# Altium PCB BOC1_06.PcbDoc (part 1 of 4)
Units mil, origin at the board's own origin, x right, y up, seen from the top; angles counter-clockwise.
Board outline 7900 x 6500 mil, 2 copper layers (Top Layer, Bottom Layer); 312 components, 413 nets, 1710 pads, 368 vias.
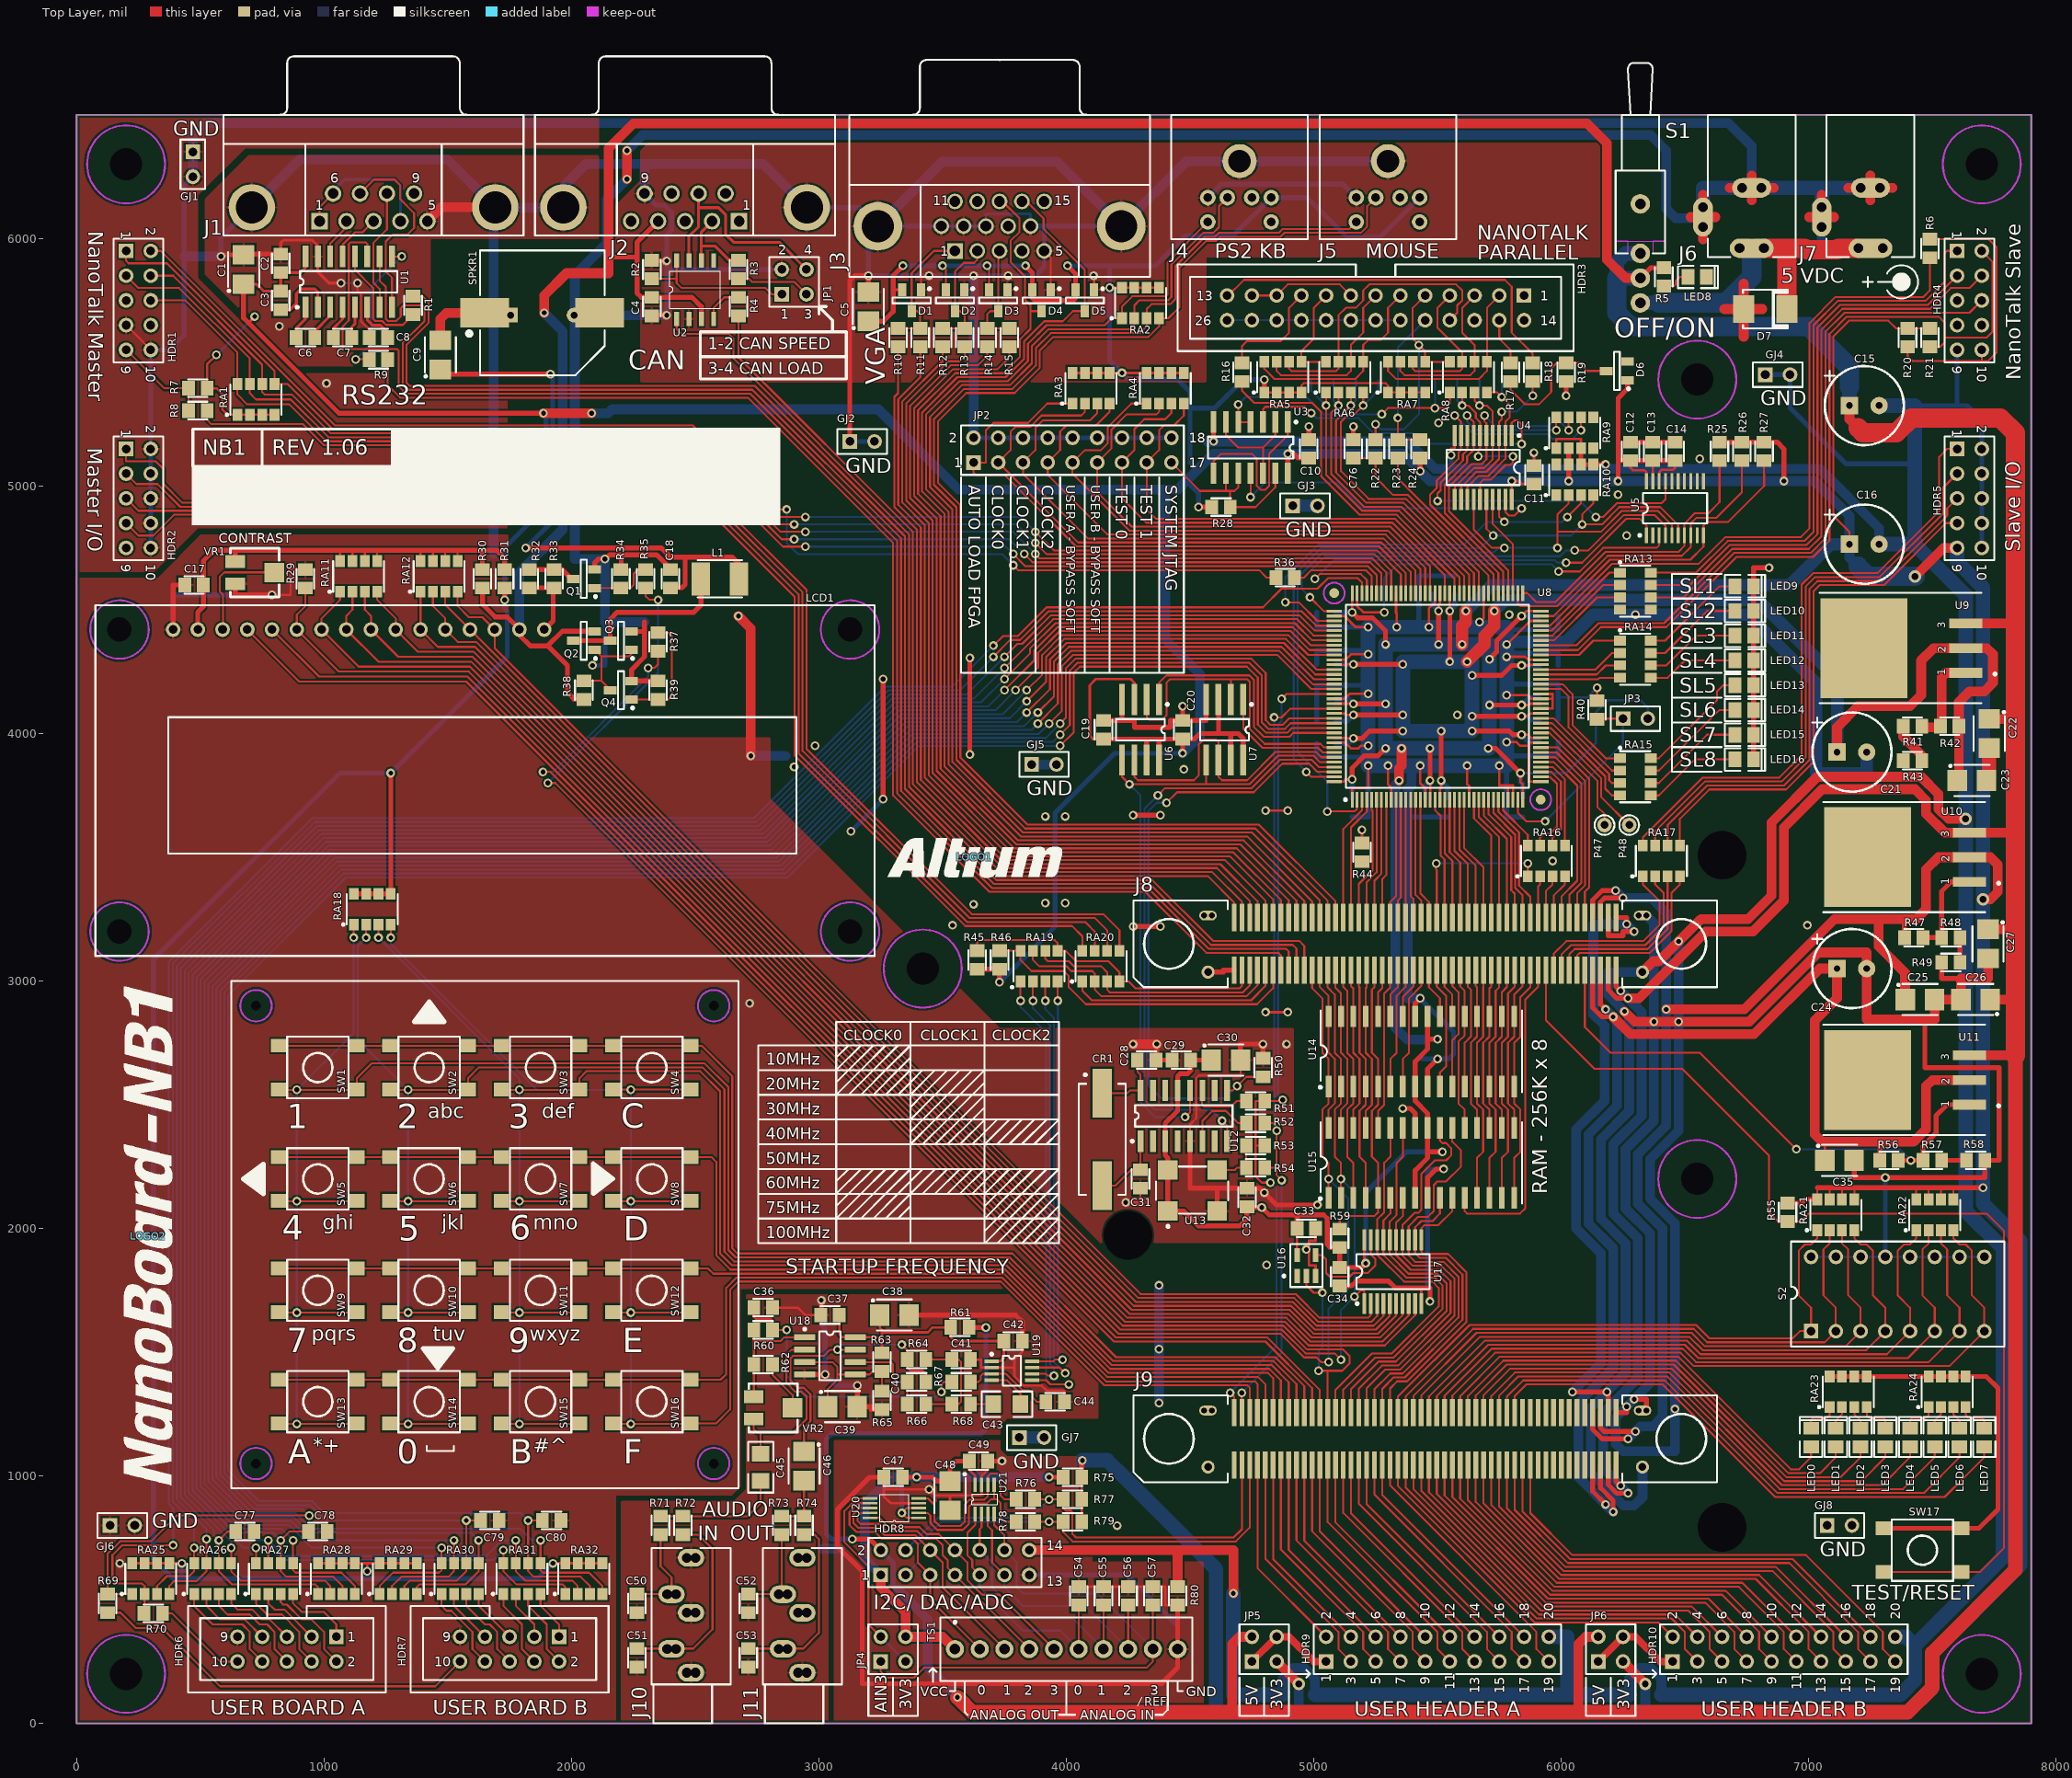
[diagram p0: Top Layer view]
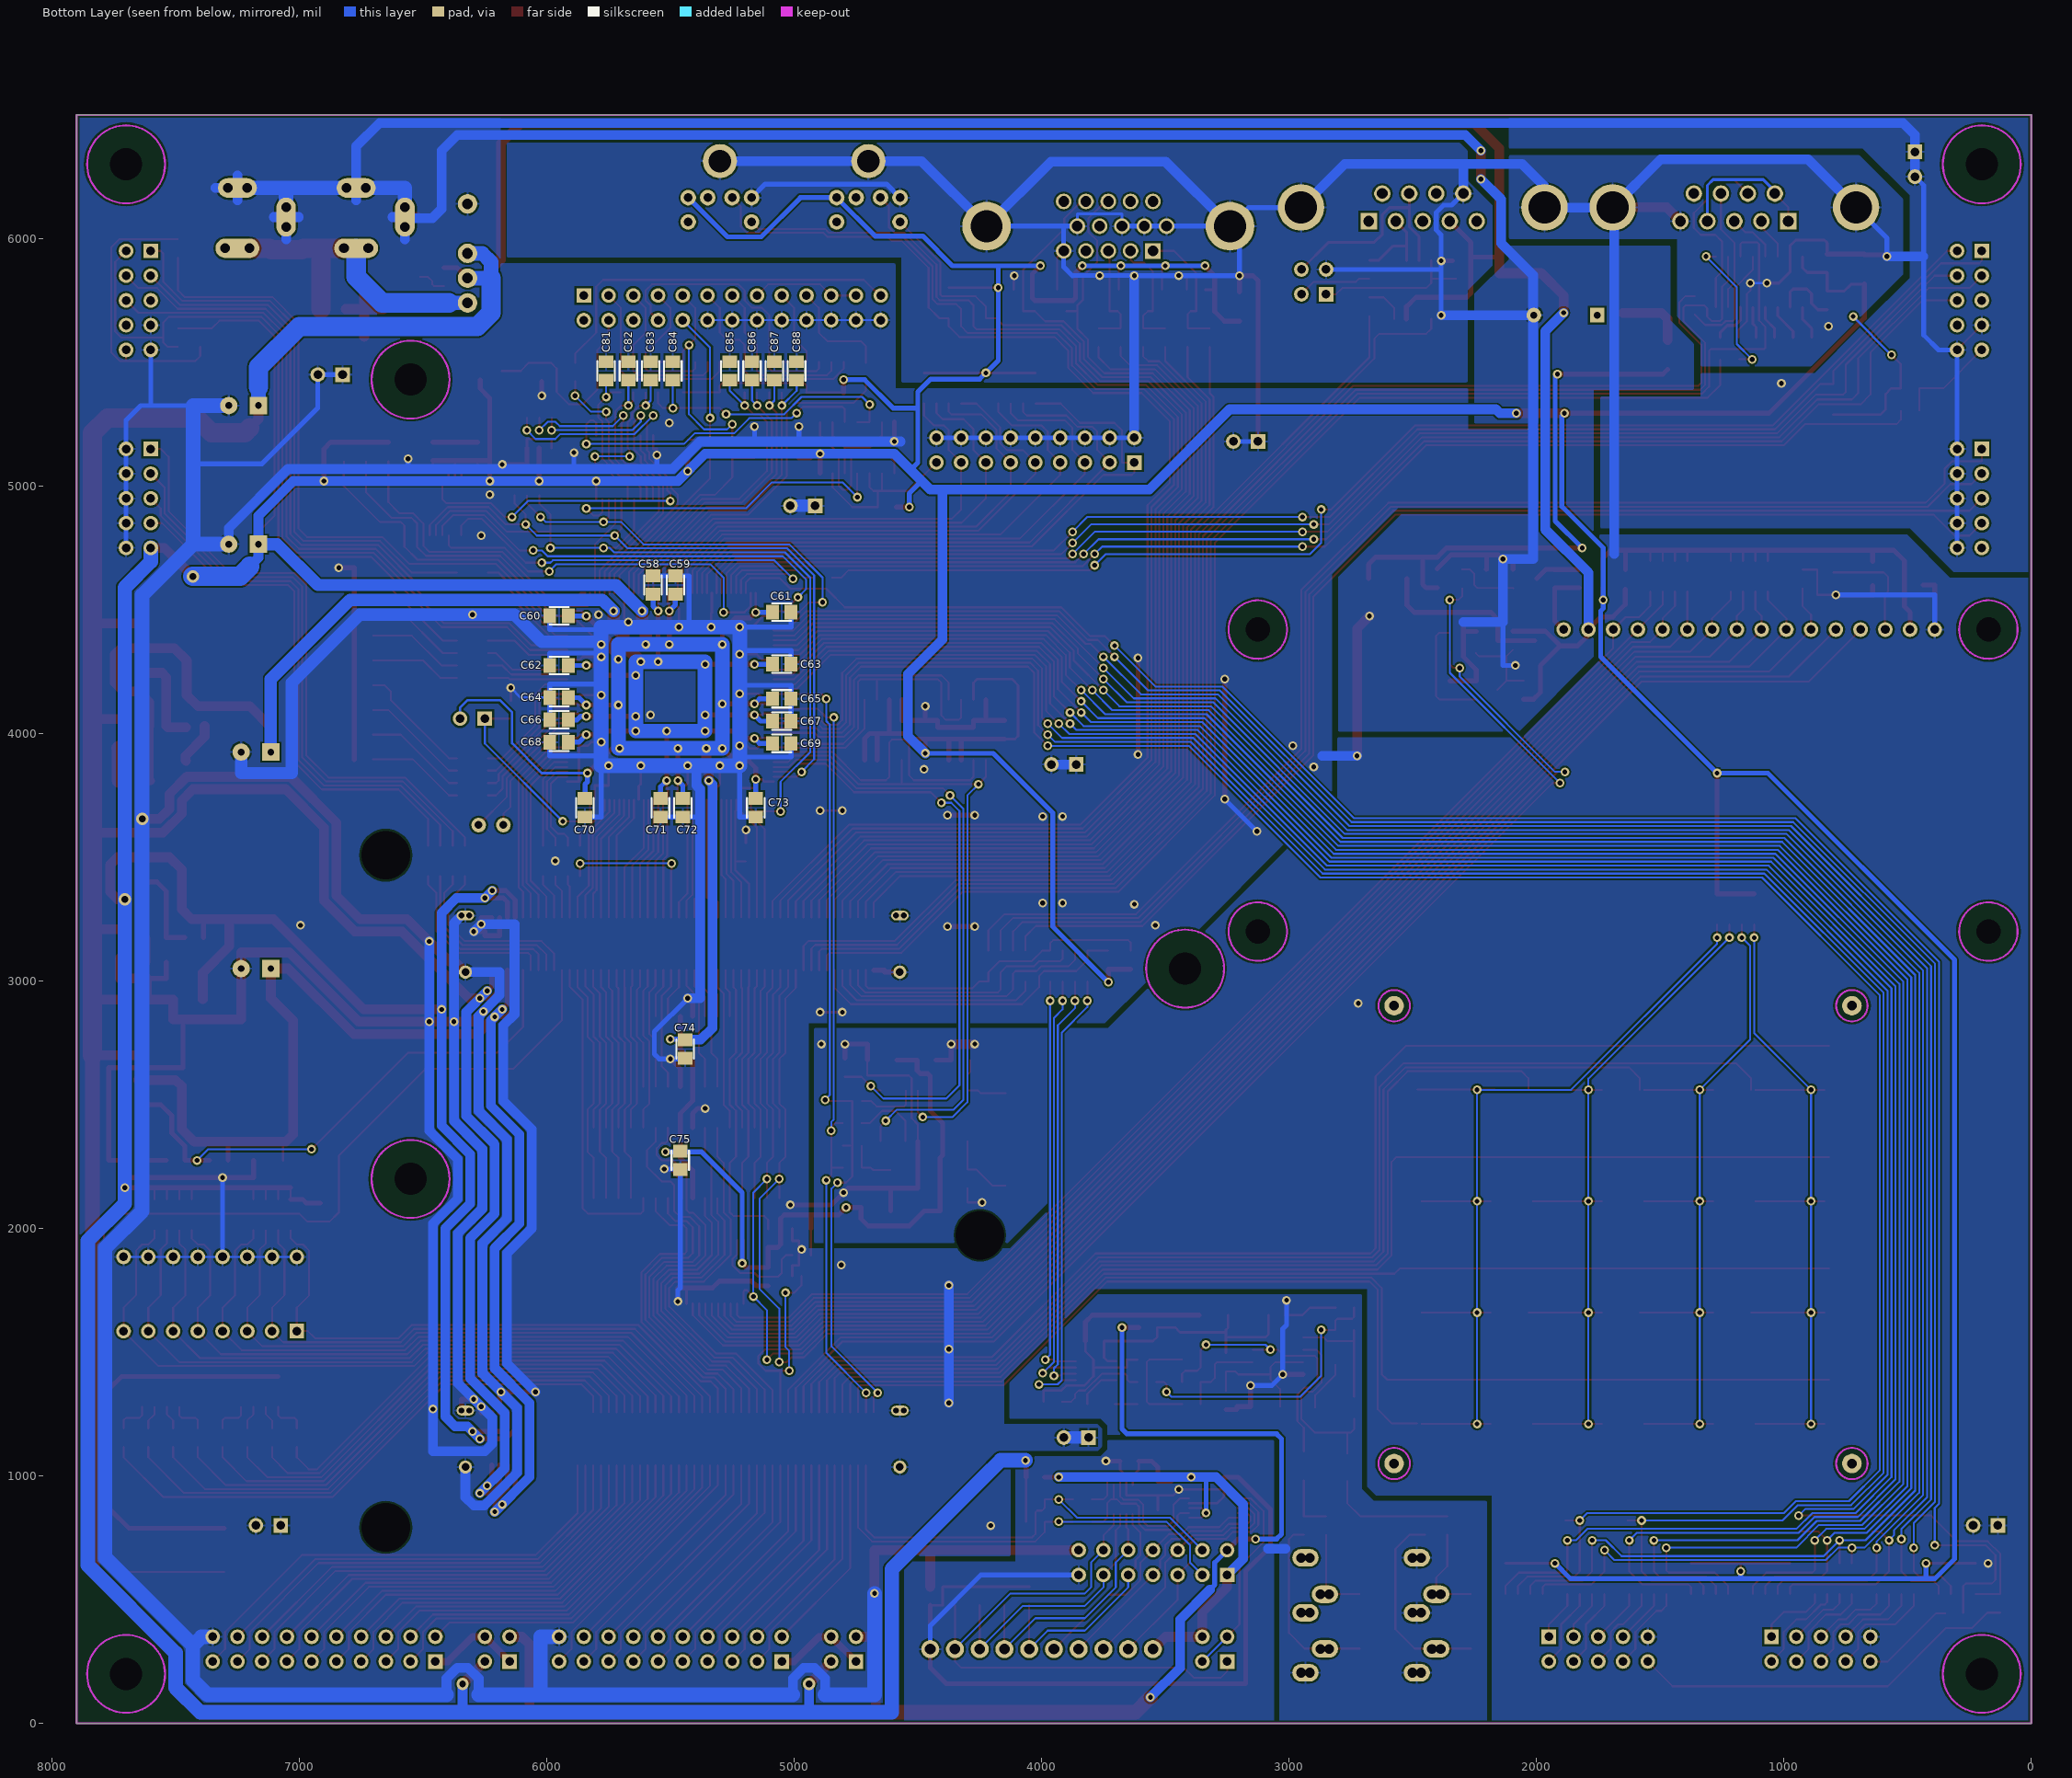
[diagram p1: Bottom Layer view, seen from below]

## Layer stack, top to bottom
Top Solder: solder mask 0.4, Solder Resist, Dk 3.5
Top Layer: signal copper 1.4
Dielectric1: core 12.6, FR-4, Dk 4.8
Bottom Layer: signal copper 1.4
Bottom Solder: solder mask 0.4, Solder Resist, Dk 3.5

## Board outline
0,0 7900,0 7900,6500 0,6500

## Design rules (kind name [scope] priority, off if disabled: settings)
Clearance [All] p1: gap=7.87 ignorepadtopadclearanceinfootprint=FALSE except(0: Arc-Hole Track-Hole SMDPad-Hole THPad-Hole Via-Hole Fill-Hole Poly-Hole Region-Hole Text-Hole)
ComponentClearance LEDComponentClearance [HasFootprint('SMD _LED') vs HasFootprint('SMD _LED')] p1: gap=1.18 collisioncheckmode=3 verticalgap=10 showdistances=FALSE
ComponentClearance ComponentClearance_General [Not InComponent('LCD1') vs Not InComponentClass('Under_LCD1')] p2: gap=7.87 collisioncheckmode=3 verticalgap=10 showdistances=FALSE
ComponentClearance ComponentClearance_Default [All] p3 off: gap=7.87 collisioncheckmode=3 verticalgap=10 showdistances=FALSE
FabricationTestPointUsage TestPointUsage [All] p1 off: valid=0 allowmultiple=FALSE
FabricationTestpoint Testpoint [All] p1 off: side=3 testpointundercomponent=TRUE minsize=40 maxsize=100 preferedsize=60 minholesize=0 maxholesize=40 preferedholesize=32 testpointgrid=1 allowsidetop=TRUE allowsidebottom=TRUE usegrid=TRUE gridtolerance=0.01
FanoutControl Fanout_Default [All] p1: bgadir=Out bgaviamode=Centered fanoutstyle=Auto fanoutdirection=Alternating viagrid=1 // Fanout_Default (Default Rule)
FanoutControl Fanout_Small [(CompPinCount < 5)] p2: bgadir=Out bgaviamode=Centered fanoutstyle=Auto fanoutdirection=OutThenIn viagrid=1 // Fanout_Small (Default Rule)
FanoutControl Fanout_LCC [IsLCC] p4: bgadir=Out bgaviamode=Centered fanoutstyle=Auto fanoutdirection=Alternating viagrid=1 // Fanout_LCC (Default Rule)
FanoutControl Fanout_BGA [IsBGA] p5: bgadir=Out bgaviamode=Centered fanoutstyle=Auto fanoutdirection=Alternating viagrid=1 // Fanout_BGA (Default Rule)
Height MaxMinHeight [All] p1: minheight=0 maxheight=1000 prefheight=500
HoleSize HoleSize_1 [inpadclass('Connector_Slot_Pads')] p1: absolutevalues=TRUE maxlimit=1 minlimit=0 maxpercent=80.000 minpercent=20.000
HoleSize [All] p2: absolutevalues=TRUE maxlimit=200.79 minlimit=1 maxpercent=80.000 minpercent=20.000
PlaneClearance [All] p1: clearance=19.68
PlaneConnect [All] p1: planeconnectstyle=Relief reliefexpansion=19.68 reliefentries=4 reliefconductorwidth=9.84 reliefairgap=9.84
PolygonConnect [All] p1: connectstyle=Relief reliefconductorwidth=9.84 reliefentries=4 polygonreliefangle="90 Angle" airgapwidth=10
RoomDefinition BOC_Audio [InComponentClass('BOC_Audio')] p1 off: confinementstyle=ConfineIn formatcopy=TRUE lockcomponents=FALSE outline 6400,6600 6600,6600 6600,6700 6400,6700
RoomDefinition BOC_Spartan [InComponentClass('BOC_Spartan')] p2 off: confinementstyle=ConfineIn formatcopy=TRUE lockcomponents=FALSE outline 5600,6600 5800,6600 5800,6700 5600,6700
RoomDefinition BOC_Boot [InComponentClass('BOC_Boot')] p3 off: confinementstyle=ConfineIn formatcopy=TRUE lockcomponents=FALSE outline 6000,6600 6200,6600 6200,6700 6000,6700
RoomDefinition BOC_KB [InComponentClass('BOC_KB')] p4 off: confinementstyle=ConfineIn formatcopy=TRUE lockcomponents=FALSE outline 598.76,864.17 598.76,2486.22 890.13,2486.22 890.13,3087.5 1134.81,3087.5 1134.81,2684.87 6027.34,2684.87 6027.34,1365.83 6541.24,1365.83 6541.24,1093.78 2350.85,1093.78 2350.85,864.17
RoomDefinition BOC_LED_DIPSWITCH [InComponentClass('BOC_LED_DIPSWITCH')] p5 off: confinementstyle=ConfineIn formatcopy=TRUE lockcomponents=FALSE outline 6933,1621 7803,1621 7803,2703 6933,2703
RoomDefinition BOC_PWR [InComponentClass('BOC_PWR')] p6 off: confinementstyle=ConfineIn formatcopy=TRUE lockcomponents=FALSE outline 358.19,5688.19 358.19,5911.81 5462.54,5911.81 5462.54,6011.81 6438.98,6011.81 6438.98,4284.65 6785.83,4284.65 6785.83,3810.3 6800.79,3810.3 6800.79,3589.7 6785.83,3589.7 6785.83,2916.14 6749.86,2916.14 6749.86,2777.86 6235.3,2777.86 6235.3,2750.2 6108.02,2750.2 6108.02,1369.09 5884.4,1369.09 5884.4,1393.7 3465.33,1393.7 3465.33,3137.93 3464.07,3137.93 3464.07,4568.19 3078.19,4568.19 3078.19,5688.19
RoomDefinition BOC_CLK_ADJ [InComponentClass('BOC_CLK_ADJ')] p7 off: confinementstyle=ConfineIn formatcopy=TRUE lockcomponents=FALSE outline 3202,2149 4333,2149 4333,3288 3202,3288
RoomDefinition BOC_IO [InComponentClass('BOC_IO')] p8 off: confinementstyle=ConfineIn formatcopy=TRUE lockcomponents=FALSE outline 3738.19,638.19 3738.19,861.81 5361.81,861.81 6559.18,861.81 6559.18,638.19 3738.19,638.19
RoomDefinition BOC_ADC_DAC [InComponentClass('BOC_ADC_DAC')] p9 off: confinementstyle=ConfineIn formatcopy=TRUE lockcomponents=FALSE outline 2611.75,974.41 2611.75,1104.33 2675.14,1104.33 2675.14,1197.14 2827.86,1197.14 2827.86,1324.87 3022.34,1324.87 3022.34,1272.34 3199.86,1272.34 3199.86,1124.87 3827.44,1124.87 3827.44,975.14 3722.15,975.14 3722.15,975.13 3720.87,975.13 3720.87,681.3 2633.86,681.3 2633.86,974.41
RoomDefinition BOC_LCD [InComponentClass('BOC_LCD')] p10 off: confinementstyle=ConfineIn formatcopy=TRUE lockcomponents=FALSE outline 47.38,2772.38 47.38,4244.94 400.14,4244.94 400.14,4347.15 588.76,4347.15 588.76,4461.57 1294.21,4461.57 1294.21,5140.3 1439.7,5140.3 1439.7,5463.78 2124.87,5463.78 2124.87,4567.15 4534.87,4567.15 4534.87,2278.52 4805.42,2278.52 4805.42,1912.25 4706.61,1912.25 4706.61,1609.23 4529.45,1609.23 4529.45,1912.25 4483.57,1912.25 4483.57,2000.14 4352.85,2000.14 4352.85,2772.38
RoomDefinition BOC_SRAM [InComponentClass('BOC_SRAM')] p11 off: confinementstyle=ConfineIn formatcopy=TRUE lockcomponents=FALSE outline 4292.66,2155.13 4292.66,2304.86 4344.79,2304.86 4344.79,3184.03 5188.78,3184.03 5188.78,2340.2 4387.15,2340.2 4387.15,2155.13
RoomDefinition BOC_DAUGHTER [InComponentClass('BOC_DAUGHTER')] p12 off: confinementstyle=ConfineIn formatcopy=TRUE lockcomponents=FALSE outline 4059.06,1271.59 4059.06,3586.68 5525.59,3586.68 5525.59,1271.59
RoomDefinition BOC_RS232 [InComponentClass('BOC_RS232')] p13 off: confinementstyle=ConfineIn formatcopy=TRUE lockcomponents=FALSE outline 481.89,5923.03 481.89,6748.03 1718.11,6748.03 1718.11,5923.03 1307.15,5923.03 1307.15,5655.13 1199.87,5655.13 1199.87,5552.85 1194.87,5552.85 1194.87,5462.66 1045.13,5462.66 1045.13,5552.86 750.13,5552.86 750.13,5675.13 677.86,5675.13 677.86,5764.7 499.21,5764.7 499.21,5923.03
RoomDefinition BOC_CAN [InComponentClass('BOC_CAN')] p14 off: confinementstyle=ConfineIn formatcopy=TRUE lockcomponents=FALSE outline 1743.31,5921.22 1743.31,6741.14 2979.53,6741.14 2979.53,5921.22 2911.81,5921.22 2911.81,5659.13 2622.34,5659.13 2622.34,5650.14 2512.01,5650.14 2512.01,5633.6 2287.6,5633.6 2287.6,5650.14 2177.86,5650.14 2177.86,5800.13 2177.66,5800.13 2177.66,5921.22
RoomDefinition BOC_VGA_KB_MOUSE [InComponentClass('BOC_VGA_KB_MOUSE')] p15 off: confinementstyle=ConfineIn formatcopy=TRUE lockcomponents=FALSE outline 2639,5519 5463,5519 5463,6734 2639,6734
RoutingVias [All] p1: holewidth=19.68 width=35.43 viastyle="Through Hole" minholewidth=19.68 minwidth=35.43 maxholewidth=28 maxwidth=50
SilkToSolderMaskClearance SilkscreenOverComponentPads [IsPad] p1: minsilkscreentomaskgap=10 clearancetoexposedcopper=TRUE
SolderMaskExpansion SolderMaskExpansion_Vias [IsVia] p1: expansion=-25.59 istentingtop=FALSE
SolderMaskExpansion [All] p2: expansion=3.94 istentingtop=FALSE
Width Pwr_Width [InNetClass('Power Nets')] p1: maxlimit=118.11 minlimit=7.87 preferedwidth=19.68 toplayer_prefwidth=9.84 minimp=50.000000 maximp=50.000000 favimp=50.000000
Width [All] p2: maxlimit=59.05 minlimit=7.87 preferedwidth=7.87
18 further rules are at their usual default settings.

## Classes and differential pairs
component class Under_LCD1: Q2 Q3 Q4 R37 R38 R39 RA18
net class RAM1_DATA[0..7]: RAM1_DATA0 RAM1_DATA1 RAM1_DATA2 RAM1_DATA3 RAM1_DATA4 RAM1_DATA5 RAM1_DATA6 RAM1_DATA7
net class "Power Nets": 1V8 5V AGND GND PWR_IN VCC VCC_LCD VCCA VCCINT
net class SWR[0..3]: SWR0 SWR1 SWR2 SWR3
net class SWC[0..3]: SWC0 SWC1 SWC2 SWC3
net class SW[0..7]: SW0 SW1 SW2 SW3 SW4 SW5 SW6 SW7
net class RAM_ADDR[0..16]: RAM_ADDR0 RAM_ADDR1 RAM_ADDR2 RAM_ADDR3 RAM_ADDR4 RAM_ADDR5 RAM_ADDR6 RAM_ADDR7 RAM_ADDR8 RAM_ADDR9 RAM_ADDR10 RAM_ADDR11 RAM_ADDR12 RAM_ADDR13 RAM_ADDR14 RAM_ADDR15 RAM_ADDR16
net class RAM_ADDR[0..1]: RAM_ADDR0 RAM_ADDR1
net class RAM0_DATA[0..7]: RAM0_DATA0 RAM0_DATA1 RAM0_DATA2 RAM0_DATA3 RAM0_DATA4 RAM0_DATA5 RAM0_DATA6 RAM0_DATA7
net class MODE_[1..8]: MODE_1 MODE_2 MODE_3 MODE_4 MODE_5 MODE_6 MODE_7 MODE_8
net class JIOB[0..3]: JIOB0 JIOB1 JIOB2 JIOB3
net class JIOA[0..3]: JIOA0 JIOA1 JIOA2 JIOA3
net class IO[0..35]: IO0 IO1 IO2 IO3 IO4 IO5 IO6 IO7 IO8 IO9 IO10 IO11 IO12 IO13 IO14 IO15 IO16 IO17 IO18 IO19 IO20 IO21 IO22 IO23 IO24 IO25 IO26 IO27 IO28 IO29 IO30 IO31 IO32 IO33 IO34 IO35
pad class Connector_Slot_Pads: J6-1 J6-2 J6-3 J7-1 J7-2 J7-3 J8-MH2 J8-MH4 J9-MH2 J9-MH4 J10-1 J10-2 J10-3 J10-4 J10-5 J11-1 J11-2 J11-3 J11-4 J11-5
component class BOC_ADC_DAC: C47 C48 C49 C54 C55 C56 C57 HDR8 JP4 R75 R76 R77 R78 R79 R80 TS1 U20 U21
component class BOC_Audio: C36 C37 C38 C39 C40 C41 C42 C43 C44 C45 C46 C50 C51 C52 C53 J10 J11 R45 R46 R60 R61 R62 R63 R64 R65 R66 R67 R68 R71 R72 R73 R74 RA19 U18 U19 VR2
component class BOC_CAN: C4 J2 JP1 R2 R3 R4 U2
component class BOC_CLK_ADJ: C28 C29 C30 C31 C32 CR1 R50 R51 R52 R53 R54 U12 U13
component class BOC_DAUGHTER: J8 J9
component class BOC_IO: HDR9 HDR10 JP5 JP6
component class BOC_KB: R55 RA18 SW1 SW2 SW3 SW4 SW5 SW6 SW7 SW8 SW9 SW10 SW11 SW12 SW13 SW14 SW15 SW16 SW17
component class BOC_LCD: C9 C17 C18 C33 C34 L1 LCD1 Q1 Q2 Q3 Q4 R29 R30 R31 R32 R33 R34 R35 R37 R38 R39 RA11 RA12 SPKR1 U16 U17 VR1
component class BOC_LED_DIPSWITCH: LED0 LED1 LED2 LED3 LED4 LED5 LED6 LED7 RA21 RA22 RA23 RA24 S2
component class BOC_PWR: C15 C16 C21 C22 C23 C24 C25 C26 C27 C35 D7 GJ1 GJ2 GJ3 GJ4 GJ5 GJ6 GJ7 GJ8 J6 J7 R41 R42 R43 R47 R48 R49 R56 R57 R58 S1 U9 U10 U11
component class BOC_RS232: C1 C2 C3 C6 C7 C8 J1 R1 R9 U1
component class BOC_SRAM: C74 C75 R59 U14 U15
component class BOC_VGA_KB_MOUSE: C5 D1 D2 D3 D4 D5 J3 J4 J5 R10 R11 R12 R13 R14 R15 RA2
component class BOC_Boot: C10 C11 C12 C13 C14 C58 C59 C60 C61 C62 C63 C64 C65 C66 C67 C68 C69 C70 C71 C72 C73 C76 C81 C82 C83 C84 C85 C86 C87 C88 D6 HDR3 JP2 JP3 R16 R17 R18 R19 R22 R23 R24 R25 R26 R27 R28 R40 RA3 RA4 RA5 RA6 RA7 RA8 RA9 RA10 U3 U4 U5
component class BOC_Spartan: C19 C20 C77 C78 C79 C80 HDR1 HDR2 HDR4 HDR5 HDR6 HDR7 LED8 LED9 LED10 LED11 LED12 LED13 LED14 LED15 LED16 R5 R6 R7 R8 R20 R21 R36 R44 R69 R70 RA1 RA13 RA14 RA15 RA16 RA17 RA20 RA25 RA26 RA27 RA28 RA29 RA30 RA31 RA32 U6 U7 U8

## Components (designator, comment, footprint, x,y, rotation, side; value= is the part's Value field where it differs from the comment)
C1 "10uF" MCCT-B 675,5875 r90 top
C2 "100nF" CC2012-0805 825,5900 r90 top
C3 "100nF" CC2012-0805 825,5750 r270 top
C4 "100nF" CC2012-0805 2325,5725 r270 top
C5 "10uF" MCCT-B 3200,5725 r90 top
C6 "100nF" CC2012-0805 925,5600 r0 top
C7 "100nF" CC2012-0805 1075,5600 r0 top
C8 "100nF" CC2012-0805 1220,5600 r180 top
C9 "10uF" MCCT-B 1470,5530 r90 top
C10 "100nF" CC2012-0805 4980,5150 r90 top
C11 "100nF" CC2012-0805 5890,5045 r90 top
C12 "100nF" CC2012-0805 6280,5140 r270 top
C13 "100nF" CC2012-0805 6370,5140 r270 top
C14 "100nF" CC2012-0805 6460,5140 r270 top
C15 "470uF 16V" RB8/3.5 7225,5325 r90 top
C16 "470uF 16V" RB8/3.5 7225,4765 r90 top
C17 "100nF" CC2012-0805 475,4600 r180 top
C18 "22nF" CC2012-0805 2400,4625 r90 top
C19 "100nF" CC2012-0805 4150,4015 r270 top
C20 "100nF" CC2012-0805 4470,4015 r90 top
C21 "470uF 16V" RB8/3.5 7175,3925 r90 top
C22 "10uF" MCCT-B 7730,4000 r270 top
C23 "10uF" MCCT-B 7660,3810 r0 top
C24 "470uF 16V" RB8/3.5 7175,3050 r90 top
C25 "10uF" MCCT-B 7450,2925 r0 top
C26 "10uF" MCCT-B 7675,2925 r180 top
C27 "10uF" MCCT-B 7725,3150 r270 top
C28 "Do Not Install" CC2012-0805 4325,2680 r0 top
C29 "100nF" CC2012-0805 4465,2680 r180 top
C30 "10uF" MCCT-B 4645,2680 r0 top
C31 "Do Not Install" CC2012-0805 4300,2200 r270 top
C32 "100nF" CC2012-0805 4730,2125 r90 top
C33 "100nF" CC2012-0805 4970,2000 r0 top
C34 "100nF" CC2012-0805 5105,1805 r270 top
C35 "10uF" MCCT-B 7125,2275 r0 top
C36 "22nF" CC2012-0805 2775,1680 r0 top
C37 "100nF" CC2012-0805 3045,1650 r0 top
C38 "10uF" MCCT-B 3305,1650 r0 top
C39 "10uF" MCCT-B 3095,1280 r0 top
C40 "470pF" CC2012-0805 3395,1380 r0 top
C41 "4700pF" CC2012-0805 3575,1470 r0 top
C42 "100nF" CC2012-0805 3785,1545 r0 top
C43 "1uF" C3216-1206 3760,1290 r0 top
C44 "4700pF" CC2012-0805 3955,1300 r0 top
C45 "1uF" C3216-1206 2765,1035 r90 top
C46 "10uF" MCCT-B 2940,1040 r270 top
C47 "100nF" CC2012-0805 3300,995 r180 top
C48 "10uF" MCCT-B 3530,920 r270 top
C49 "100nF" CC2012-0805 3645,1060 r0 top
C50 "220pF" CC2012-0805 2265,485 r270 top
C51 "220pF" CC2012-0805 2265,265 r270 top
C52 "220pF" CC2012-0805 2715,485 r270 top
C53 "220pF" CC2012-0805 2715,265 r270 top
C54 "100pF" CC2012-0805 4050,515 r90 top
C55 "100pF" CC2012-0805 4150,515 r90 top
C56 "100pF" CC2012-0805 4250,515 r90 top
C57 "100pF" CC2012-0805 4350,515 r90 top
C58 "100nF" CC2012-0805 5570,4600 r90 bottom
C59 "100nF" CC2012-0805 5480,4600 r90 bottom
C60 "100nF" CC2012-0805 5950,4475 r0 bottom
C61 "100nF" CC2012-0805 5050,4490 r180 bottom
C62 "100nF" CC2012-0805 5950,4275 r0 bottom
C63 "100nF" CC2012-0805 5050,4280 r180 bottom
C64 "100nF" CC2012-0805 5950,4145 r0 bottom
C65 "100nF" CC2012-0805 5050,4140 r180 bottom
C66 "100nF" CC2012-0805 5950,4055 r0 bottom
C67 "100nF" CC2012-0805 5050,4050 r180 bottom
C68 "100nF" CC2012-0805 5950,3965 r0 bottom
C69 "100nF" CC2012-0805 5050,3960 r180 bottom
C70 "100nF" CC2012-0805 5845,3700 r270 bottom
C71 "100nF" CC2012-0805 5540,3700 r270 bottom
C72 "100nF" CC2012-0805 5450,3700 r270 bottom
C73 "100nF" CC2012-0805 5155,3700 r270 bottom
C74 "100nF" CC2012-0805 5440,2725 r270 bottom
C75 "100nF" CC2012-0805 5460,2275 r270 bottom
C76 "100pF" CC2012-0805 5160,5150 r90 top
C77 "1nF" CC2012-0805 680,775 r0 top
C78 "1nF" CC2012-0805 975,775 r0 top
C79 "1nF" CC2012-0805 1670,820 r0 top
C80 "1nF" CC2012-0805 1920,820 r0 top
C81 "1nF" CC2012-0805 5760,5465 r90 bottom
C82 "1nF" CC2012-0805 5670,5465 r90 bottom
C83 "1nF" CC2012-0805 5580,5465 r90 bottom
C84 "1nF" CC2012-0805 5490,5465 r90 bottom
C85 "1nF" CC2012-0805 5260,5465 r90 bottom
C86 "1nF" CC2012-0805 5170,5465 r90 bottom
C87 "1nF" CC2012-0805 5080,5465 r90 bottom
C88 "1nF" CC2012-0805 4990,5465 r90 bottom
CR1 "QC49/SMD" QC49/SMD 4145,2360 r270 top
D1 "BAS40-04" SO-G3 3375,5750 r180 top
D2 "BAS40-04" SO-G3 3550,5750 r180 top
D3 "BAS40-04" SO-G3 3725,5750 r180 top
D4 "BAS40-04" SO-G3 3900,5750 r180 top
D5 "BAS40-04" SO-G3 4075,5750 r180 top
D6 "BAS40" SO-G3 6225,5465 r90 top
D7 "SMBJ5341B" DO214 6825,5715 r0 top
GJ1 "Header 2" HDR1X2 470,6350 r270 top
GJ2 "Header 2" HDR1X2 3125,5180 r0 top
GJ3 "Header 2" HDR1X2 4915,4920 r0 top
GJ4 "Header 2" HDR1X2 6825,5450 r0 top
GJ5 "Header 2" HDR1X2 3860,3875 r0 top
GJ6 "Header 2" HDR1X2 135,800 r0 top
GJ7 "Header 2" HDR1X2 3810,1155 r0 top
GJ8 "Header 2" HDR1X2 7075,800 r0 top
HDR1 "Header 5X2" HDR2X5 200,5950 r270 top
HDR2 "Header 5X2" HDR2X5 200,5150 r270 top
HDR3 "70246-2622" HDR2X13_CEN_LP 5850,5770 r180 top
HDR4 "Header 5X2" HDR2X5 7600,5950 r270 top
HDR5 "Header 5X2" HDR2X5 7600,5150 r270 top
HDR6 "70246-1022" HDR2X5_LP 1050,350 r180 top
HDR7 "70246-1022" HDR2X5_LP 1950,350 r180 top
HDR8 "Header 7X2" HDR2X7 3250,600 r0 top
HDR9 "Header 10X2" HDR2X10 5050,250 r0 top
HDR10 "Header 10X2" HDR2X10 6450,250 r0 top
J1 "DB9 Female" DSUB1.385-2H9 1200,6500 r0 top
J2 "D Connector 9_MALE" DSUB1.9_MALE 2622.88,6181.89 r0 top
J3 "Dsub-15-Female-HD" DB15-VGA-Female 3550,5950 r0 top
J4 "8918-P6" PS2-6PIN 4700,6500 r0 top
J5 "8918-P6" PS2-6PIN 5300,6500 r0 top
J6 "KLD-0202-B" KLD-0202 6770,6500 r270 top
J7 "KLD-0202-B" KLD-0202 7250,6500 r270 top
J8 "53751-1009" 53751 5450,3150 r0 top locked
J9 "53751-1009" 53751 5450,1150 r0 top locked
J10 "ST-3150-5N" ST-3150-5N 2450,0 r180 top
J11 "ST-3150-5N" ST-3150-5N 2900,0 r180 top
JP1 "Header 2X2" HDR2X2 2850,5775 r0 top
JP2 "Header 9X2" HDR2X9 3625,5095 r0 top
JP3 "Header 2" HDR1X2 6250,4060 r0 top
JP4 "Header 2X2" HDR2X2_B 3250,250 r0 top
JP5 "Header 2X2" HDR2X2_B 4750,250 r0 top
JP6 "Header 2X2" HDR2X2_B 6150,250 r0 top
L1 "330uH" CC4532-1812 2600,4625 r0 top
LCD1 "162A" 162A 75.04,3101.1 r0 top locked
LED0 "HSMH-C170" "SMD _LED" 7010,1155 r270 top
LED1 "HSMH-C170" "SMD _LED" 7110,1155 r270 top
LED2 "HSMH-C170" "SMD _LED" 7210,1155 r270 top
LED3 "HSMH-C170" "SMD _LED" 7310,1155 r270 top
LED4 "HSMH-C170" "SMD _LED" 7410,1155 r270 top
LED5 "HSMH-C170" "SMD _LED" 7510,1155 r270 top
LED6 "HSMH-C170" "SMD _LED" 7610,1155 r270 top
LED7 "HSMH-C170" "SMD _LED" 7710,1155 r270 top
LED8 "HSMH-C170" "SMD _LED" 6550,5845 r180 top
LED9 "HSMH-C170" "SMD _LED" 6740,4595 r180 top
LED10 "HSMH-C170" "SMD _LED" 6740,4495 r180 top
LED11 "HSMH-C170" "SMD _LED" 6740,4395 r180 top
LED12 "HSMH-C170" "SMD _LED" 6740,4295 r180 top
LED13 "HSMH-C170" "SMD _LED" 6740,4195 r180 top
LED14 "HSMH-C170" "SMD _LED" 6740,4095 r180 top
LED15 "HSMH-C170" "SMD _LED" 6740,3995 r180 top
LED16 "HSMH-C170" "SMD _LED" 6740,3895 r180 top
LOGO1 "Altium_Logo" Altium_Logo 3630,3500 r0 top
LOGO2 "NanoBoard1_LOGO" NanoBoard1_LOGO 290,1970 r90 top
Q1 "2N7002" SO-G3 2050,4625 r90 top
Q2 "BSS84" SO-G3 2050,4375 r90 top
Q3 "2N7002" SO-G3 2200,4375 r90 top
Q4 "2N7002" SO-G3 2200,4175 r90 top
R1 "100R" CC2012-0805 1360,5730 r270 top
R2 "15K" CC2012-0805 2325,5875 r270 top
R3 "120R" CC2012-0805 2675,5875 r90 top
R4 "270R" CC2012-0805 2675,5725 r90 top
R5 "270R" CC2012-0805 6415,5845 r270 top
R6 "1K" CC2012-0805 7490,5960 r90 top
R7 "1K" CC2012-0805 490,5395 r180 top
R8 "1K" CC2012-0805 490,5305 r0 top
R9 "100R" CC2012-0805 1220,5510 r180 top
R10 "680R" CC2012-0805 3320,5600 r90 top
R11 "330R" CC2012-0805 3410,5600 r90 top
R12 "680R" CC2012-0805 3500,5600 r90 top
R13 "330R" CC2012-0805 3590,5600 r90 top
R14 "680R" CC2012-0805 3680,5600 r90 top
R15 "330R" CC2012-0805 3770,5600 r90 top
R16 "47R" CC2012-0805 4710,5460 r270 top
R17 "100R" CC2012-0805 5795,5460 r270 top
R18 "47R" CC2012-0805 5885,5460 r270 top
R19 "4K7" CC2012-0805 6020,5460 r270 top
R20 "1K" CC2012-0805 7400,5600 r270 top
R21 "4K7" CC2012-0805 7490,5600 r270 top
R22 "1K" CC2012-0805 5250,5150 r270 top
R23 "1K" CC2012-0805 5340,5150 r270 top
R24 "1K" CC2012-0805 5430,5150 r270 top
R25 "4K7" CC2012-0805 6640,5140 r270 top
R26 "4K7" CC2012-0805 6730,5140 r270 top
R27 "4K7" CC2012-0805 6820,5140 r270 top
R28 "4K7" CC2012-0805 4625,4915 r180 top
R29 "4K7" CC2012-0805 925,4625 r90 top
R30 "0R" CC2012-0805 1640,4625 r90 top
R31 "0R" CC2012-0805 1730,4625 r90 top
R32 "68R" CC2012-0805 1830,4625 r90 top
R33 "68R" CC2012-0805 1930,4625 r90 top
R34 "10K" CC2012-0805 2200,4625 r270 top
R35 "560R" CC2012-0805 2300,4625 r90 top
R36 "100R" CC2012-0805 4885,4630 r0 top
R37 "560R" CC2012-0805 2350,4370 r90 top
R38 "4K7" CC2012-0805 2050,4175 r90 top
R39 "10K" CC2012-0805 2350,4175 r90 top
R40 "1K" CC2012-0805 6145,4095 r270 top
R41 "47R" CC2012-0805 7420,4030 r180 top
R42 "120R" CC2012-0805 7570,4030 r180 top
R43 "5R6" CC2012-0805 7420,3890 r180 top
R44 "1K" CC2012-0805 5195,3520 r270 top
R45 "4K7" CC2012-0805 3640,3085 r270 top
R46 "4K7" CC2012-0805 3730,3085 r270 top
R47 "120R" CC2012-0805 7425,3175 r0 top
R48 "100R" CC2012-0805 7575,3175 r0 top
R49 "100R" CC2012-0805 7575,3075 r0 top
R50 "1K" CC2012-0805 4795,2650 r90 top
R51 "33R" CC2012-0805 4765,2515 r0 top
R52 "33R" CC2012-0805 4765,2425 r0 top
R53 "33R" CC2012-0805 4765,2335 r0 top
R54 "33R" CC2012-0805 4765,2245 r0 top
R55 "4K7" CC2012-0805 6915,2065 r270 top
R56 "120R" CC2012-0805 7325,2275 r0 top
R57 "47R" CC2012-0805 7500,2275 r0 top
R58 "5R6" CC2012-0805 7675,2275 r0 top
R59 "4K7" CC2012-0805 5105,1960 r90 top
R60 "470R" CC2012-0805 2775,1590 r0 top
R61 "10R" CC2012-0805 3570,1600 r180 top
R62 "1K" CC2012-0805 2775,1450 r180 top
R63 "10K" CC2012-0805 3255,1460 r90 top
R64 "4K7" CC2012-0805 3395,1470 r0 top
R65 "10K" CC2012-0805 3255,1305 r90 top
R66 "18K" CC2012-0805 3395,1290 r180 top
R67 "1K8" CC2012-0805 3575,1380 r0 top
R68 "4K7" CC2012-0805 3575,1290 r0 top
R69 "100R" CC2012-0805 125,485 r270 top
R70 "100R" CC2012-0805 310,445 r0 top
R71 "10K" CC2012-0805 2360,800 r90 top
R72 "10K" CC2012-0805 2450,800 r90 top
R73 "560R" CC2012-0805 2850,800 r90 top
R74 "560R" CC2012-0805 2940,800 r90 top
R75 "4R7" CC2012-0805 4025,995 r0 top
R76 "100R" CC2012-0805 3835,905 r180 top
R77 "4K7" CC2012-0805 4025,905 r180 top
R78 "100R" CC2012-0805 3835,815 r180 top
R79 "4K7" CC2012-0805 4025,815 r180 top
R80 "0R" CC2012-0805 4450,515 r270 top
RA1 "4K7" MNR34 725,5350 r90 top
RA2 "4K7" MNR34 4300,5740 r90 top
RA3 "4K7" MNR34 4100,5395 r90 top
RA4 "4K7" MNR34 4400,5395 r90 top
RA5 "4K7" MNR34 4875,5440 r90 top
RA6 "100R" MNR34 5125,5440 r90 top
RA7 "4K7" MNR34 5375,5440 r90 top
RA8 "100R" MNR34 5625,5440 r90 top
RA9 "4K7" MNR34 6055,5215 r90 top
RA10 "4K7" MNR34 6055,5025 r90 top
RA11 "4K7" MNR34 1140,4635 r90 top
RA12 "4K7" MNR34 1465,4635 r90 top
RA13 "100R" MNR34 6300,4575 r0 top
RA14 "270R" MNR34 6300,4300 r0 top
RA15 "270R" MNR34 6300,3825 r0 top
RA16 "100R" MNR34 5940,3485 r90 top
RA17 "100R" MNR34 6405,3485 r90 top
RA18 "4K7" MNR34 1195,3290 r90 top
RA19 "100R" MNR34 3890,3060 r90 top
RA20 "100R" MNR34 4140,3060 r90 top
RA21 "4K7" MNR34 7110,2055 r90 top
RA22 "4K7" MNR34 7510,2055 r90 top
RA23 "270R" MNR34 7160,1340 r90 top
RA24 "270R" MNR34 7560,1340 r90 top
RA25 "4K7" MNR34 300,585 r90 top
RA26 "100R" MNR34 550,585 r90 top
RA27 "100R" MNR34 800,585 r90 top
RA28 "4K7" MNR34 1050,585 r90 top
RA29 "4K7" MNR34 1300,585 r90 top
RA30 "100R" MNR34 1550,585 r90 top
RA31 "100R" MNR34 1800,585 r90 top
RA32 "4K7" MNR34 2050,585 r90 top
S1 "TL36WW050" TL36WW15050 6320,5940 r0 top
S2 "A6ER-8104" DIP-16-KEY 7010,1585 r0 top
SPKR1 "ABSM-1574-05 Transducer" ABSM-1574 1650,5700 r0 top
SW1 "DTSM-61-NR" B3FS_SWITCH 975,2650 r180 top
SW2 "DTSM-61-NR" B3FS_SWITCH 1425,2650 r180 top
SW3 "DTSM-61-NR" B3FS_SWITCH 1875,2650 r180 top
SW4 "DTSM-61-NR" B3FS_SWITCH 2325,2650 r180 top
SW5 "DTSM-61-NR" B3FS_SWITCH 975,2200 r180 top
SW6 "DTSM-61-NR" B3FS_SWITCH 1425,2200 r180 top
SW7 "DTSM-61-NR" B3FS_SWITCH 1875,2200 r180 top
SW8 "DTSM-61-NR" B3FS_SWITCH 2325,2200 r180 top
SW9 "DTSM-61-NR" B3FS_SWITCH 975,1750 r180 top
SW10 "DTSM-61-NR" B3FS_SWITCH 1425,1750 r180 top
SW11 "DTSM-61-NR" B3FS_SWITCH 1875,1750 r180 top
SW12 "DTSM-61-NR" B3FS_SWITCH 2325,1750 r180 top
SW13 "DTSM-61-NR" B3FS_SWITCH 975,1300 r180 top
SW14 "DTSM-61-NR" B3FS_SWITCH 1425,1300 r180 top
SW15 "DTSM-61-NR" B3FS_SWITCH 1875,1300 r180 top
SW16 "DTSM-61-NR" B3FS_SWITCH 2325,1300 r180 top
SW17 "DTSM-61-NR" B3FS_SWITCH 7460,700 r0 top
TS1 "TS10" TS2.54x10 3550,300 r90 top
U1 "MAX3232CSE" SO-G16 1100,5825 r0 top
U2 "MCP2551" SOIC8 2425,5675 r90 top
U3 "SN74LVC00AD" SO-G14/Y2.2 4745,5155 r180 top
U4 "SN74LVC244ADB" SSO-G20/P.65 5685,5075 r180 top
U5 "XCF01SVO20C" VO20 6460,4910 r0 top
U6 "M25P80-VMW6" SO8_MW/SO8_MN 4300,4015 r180 top
U7 "M25P80-VMW6" SO8_MW/SO8_MN 4640,4015 r180 top
U8 "XC2S100E-6TQ144C" TQ144 5500,4150 r90 top
U9 "LM1084IS-ADJ" TO-263 7635,4245 r90 top
U10 "LM1084IS-ADJ" TO-263 7650,3400 r90 top
U11 "LM1084IS-ADJ" TO-263 7650,2500 r90 top
U12 "ICS307M-02" SO-G16 4475,2455 r0 top
U13 "QSMO_4200" QSMO_4200 4410,2055 r0 top
U14 "IDT71V124SA15Y" SO-J32 5435,2715 r0 top
U15 "IDT71V124SA15Y" SO-J32 5435,2265 r0 top
U16 "SN74LVC1G04DBV" SO-G5/P.95 4970,1850 r0 top
U17 "SN74LVC245ADB" SSO-G20/P.65 5320,1825 r0 top
U18 "OPA2340UA" SO-G8 3045,1485 r270 top
U19 "MAX1104EUA" TSSO3x5-G8/X.35 3780,1425 r270 top
U20 "MAX5841MEUB" USOP10 3305,870 r180 top
U21 "MAX1037EKA-T" SOT23_8 3670,905 r90 top
VR1 "20K" POT4MM-2 720,4650 r0 top
VR2 "100K" POT4MM-2 2815,1275 r0 top

## Footprints (in the part's own frame and the unit in brackets; to place one, negate y for a bottom-side part, rotate by r counter-clockwise, add the part's x,y. Pads: shape width x height; smd on the part's side, far side on the other; paste and mask are expansions set on the pad)
162A [mm]
  round 1.5 hole 0.9: 1(8,33.5) 2(10.54,33.5) 3(13.08,33.5) 4(15.62,33.5) 5(18.16,33.5) 6(20.7,33.5) 7(23.24,33.5) 8(25.78,33.5) 9(28.32,33.5) 10(30.86,33.5) 11(33.4,33.5) 12(35.94,33.5) 13(38.48,33.5) 14(41.02,33.5) 15(43.56,33.5) 16(46.1,33.5)
  round 2.3 hole 2.5 unplated mask+0.1: M1(2.5,33.5) M2(77.5,33.5) M3(2.5,2.5) M4(77.5,2.5)
  Keep-Out Layer circle w0.2: c2.5,33.5 r3
  Keep-Out Layer circle w0.2: c2.5,2.5 r3
  Keep-Out Layer circle w0.2: c77.5,2.5 r3
  Keep-Out Layer circle w0.2: c77.5,33.5 r3
  silkscreen extent 0,0 80,36
53751 [mm] "Connector; Docking Station, Plug; 100 Position; Vertical"
  rect 0.5x2.8 smd: 1(-19.6,-2.7) 2(-19.6,2.7) 3(-18.8,-2.7) 4(-18.8,2.7) 5(-18,-2.7) 6(-18,2.7) 7(-17.2,-2.7) 8(-17.2,2.7) 9(-16.4,-2.7) 10(-16.4,2.7) 11(-15.6,-2.7) 12(-15.6,2.7) 13(-14.8,-2.7) 14(-14.8,2.7) 15(-14,-2.7) 16(-14,2.7) 17(-13.2,-2.7) 18(-13.2,2.7) 19(-12.4,-2.7) 20(-12.4,2.7) 21(-11.6,-2.7) 22(-11.6,2.7) 23(-10.8,-2.7) 24(-10.8,2.7) 25(-10,-2.7) 26(-10,2.7) 27(-9.2,-2.7) 28(-9.2,2.7) 29(-8.4,-2.7) 30(-8.4,2.7) 31(-7.6,-2.7) 32(-7.6,2.7) 33(-6.8,-2.7) 34(-6.8,2.7) 35(-6,-2.7) 36(-6,2.7) 37(-5.2,-2.7) 38(-5.2,2.7) 39(-4.4,-2.7) 40(-4.4,2.7) 41(-3.6,-2.7) 42(-3.6,2.7) 43(-2.8,-2.7) 44(-2.8,2.7) 45(-2,-2.7) 46(-2,2.7) 47(-1.2,-2.7) 48(-1.2,2.7) 49(-0.4,-2.7) 50(-0.4,2.7) 51(0.4,-2.7) 52(0.4,2.7) 53(1.2,-2.7) 54(1.2,2.7) 55(2,-2.7) 56(2,2.7) 57(2.8,-2.7) 58(2.8,2.7) 59(3.6,-2.7) 60(3.6,2.7) 61(4.4,-2.7) 62(4.4,2.7) 63(5.2,-2.7) 64(5.2,2.7) 65(6,-2.7) 66(6,2.7) 67(6.8,-2.7) 68(6.8,2.7) 69(7.6,-2.7) 70(7.6,2.7) 71(8.4,-2.7) 72(8.4,2.7) 73(9.2,-2.7) 74(9.2,2.7) 75(10,-2.7) 76(10,2.7) 77(10.8,-2.7) 78(10.8,2.7) 79(11.6,-2.7) 80(11.6,2.7) 81(12.4,-2.7) 82(12.4,2.7) 83(13.2,-2.7) 84(13.2,2.7) 85(14,-2.7) 86(14,2.7) 87(14.8,-2.7) 88(14.8,2.7) 89(15.6,-2.7) 90(15.6,2.7) 91(16.4,-2.7) 92(16.4,2.7) 93(17.2,-2.7) 94(17.2,2.7) 95(18,-2.7) 96(18,2.7) 97(18.8,-2.7) 98(18.8,2.7) 99(19.6,-2.7) 100(19.6,2.7)
  round 1.35 hole 0.8: MH1(-22.283,-2.9) MH3(22.317,-2.9)
  oval 1.8x1 all layers, no hole: MH2(-22.283,2.9) MH4(22.317,2.9)
  round 0.7 hole 0.6: MH2A(-22.683,2.9) MH2B(-21.883,2.9) MH4A(21.917,2.9) MH4B(22.717,2.9)
  silkscreen extent -29.95,-4.45 29.95,4.45
ABSM-1574 [mm]
  rect 5x3 smd: 1(0,0) 2(11.8,0)
  rect 1.5x1.5 hole 0.7: 1A(2.65,-0.24)
  round 1.5 hole 0.7: 2A(9.15,-0.24)
  silkscreen extent -1.83,-6.4 12.3,6.4
Altium_Logo [mil] "Altium Logo"
  silkscreen extent -352,-81 352,77
B3FS_SWITCH [mm]
  rect 1.6x1.4 smd: 1(4.01,-2.25) 2(-4,-2.25) 3(4.01,2.24) 4(-4,2.24)
  silkscreen extent -3.16,-3.16 3.15,3.15
C3216-1206 [mm]
  rect 1.6x1.8 smd: 1(-1.4,0) 2(1.4,0)
  silkscreen extent -2.6,-1.3 2.6,1.3
CC2012-0805 [mm]
  rect 1.3x1.5 smd: 1(-0.95,0) 2(0.95,0)
  silkscreen extent -1,-0.9 1,0.9
CC4532-1812 [mm]
  rect 1.9x3.4 smd: 1(-1.95,0) 2(1.95,0)
  silkscreen extent -2.3,-1.9 2.3,1.9
DB15-VGA-Female [mm] "High density D sub 15 pin Female connector"
  rect 1.6x1.6 hole 1.1: 1(0,0)
  round 1.6 hole 1.1: 2(2.29,0) 3(4.58,0) 4(6.87,0) 5(9.16,0) 6(-1.4,2.54) 7(0.89,2.54) 8(3.18,2.54) 9(5.47,2.54) 10(7.76,2.54) 11(0,5.08) 12(2.29,5.08) 13(4.58,5.08) 14(6.87,5.08) 15(9.16,5.08)
  round 5 hole 3.3: 16(-7.915,2.54) 17(17.075,2.54)
  silkscreen extent -10.83,-2.65 20.01,19.61
DIP-16-KEY [mm]
  rect 1.5x1.5 hole 0.9: 1(0,0)
  round 1.5 hole 0.9: 2(2.54,0) 3(5.08,0) 4(7.62,0) 5(10.16,0) 6(12.7,0) 7(15.24,0) 8(17.78,0) 9(17.78,7.62) 10(15.24,7.62) 11(12.7,7.62) 12(10.16,7.62) 13(7.62,7.62) 14(5.08,7.62) 15(2.54,7.62) 16(0,7.62)
  silkscreen extent -2.05,-1.59 19.83,9.2
DO214 [mil] "DO-214-AC/SMA; 2 C-Bend Leads; Body 5.3 x 2.6 mm, inc. leads (LxW)"
  rect 85x110 smd: 1(-87.5,0) 2(87.5,0)
  silkscreen extent -90,-78 90,78
DSUB1.9_MALE [mm]
  rect 1.69x1.69 hole 1.1: 1(1.385,-2.84)
  round 1.69 hole 1.1: 2(-1.385,-2.84) 3(-4.155,-2.84) 4(-6.925,-2.84) 5(-9.695,-2.84) 6(0,0) 7(-2.77,0) 8(-5.54,0) 9(-8.31,0)
  round 4.76 hole 3.3: 10(-16.65,-1.42) 11(8.34,-1.42)
  silkscreen extent -19.56,-4.32 11.24,14.08
DSUB1.385-2H9 [mm]
  rect 1.69x1.69 hole 1.1: 1(-5.54,-10.92)
  round 1.69 hole 1.1: 2(-2.77,-10.92) 3(0,-10.92) 4(2.77,-10.92) 5(5.54,-10.92) 6(-4.155,-8.08) 7(-1.385,-8.08) 8(1.385,-8.08) 9(4.155,-8.08)
  round 4.76 hole 3.3: 10(-12.495,-9.5) 11(12.495,-9.5)
  silkscreen extent -15.4,-12.4 15.4,6
HDR1X2 [mm]
  rect 1.5x1.5 hole 0.9: 1(0,0)
  round 1.5 hole 0.9: 2(2.54,0)
  silkscreen extent -1.27,-1.27 3.81,1.27
HDR2X2 [mm]
  rect 1.5x1.5 hole 0.9: 1(0,0)
  round 1.5 hole 0.9: 2(0,2.54) 3(2.54,0) 4(2.54,2.54)
  silkscreen extent -1.27,-1.27 3.81,3.81
HDR2X2_B [mm] "2x2 HDR un-numbered"
  rect 1.5x1.5 hole 0.9: 1(0,0)
  round 1.5 hole 0.9: 2(0,2.54) 3(2.54,0) 4(2.54,2.54)
  silkscreen extent -1.27,-1.27 3.81,3.81
HDR2X5 [mm]
  rect 1.5x1.5 hole 0.9: 1(0,0)
  round 1.5 hole 0.9: 2(0,2.54) 3(2.54,0) 4(2.54,2.54) 5(5.08,0) 6(5.08,2.54) 7(7.62,0) 8(7.62,2.54) 9(10.16,0) 10(10.16,2.54)
  silkscreen extent -1.27,-1.27 11.43,3.81
HDR2X5_LP [mm] "Header, Shrouded, Dual Row, Low Profile Vertical, 10 pins"
  rect 1.5x1.5 hole 0.9: 1(0,0)
  round 1.5 hole 0.9: 2(0,2.54) 3(2.54,0) 4(2.54,2.54) 5(5.08,0) 6(5.08,2.54) 7(7.62,0) 8(7.62,2.54) 9(10.16,0) 10(10.16,2.54)
  silkscreen extent -5.08,-3.18 15.24,5.72
HDR2X7 [mm]
  rect 1.5x1.5 hole 0.9: 1(0,0)
  round 1.5 hole 0.9: 2(0,2.54) 3(2.54,0) 4(2.54,2.54) 5(5.08,0) 6(5.08,2.54) 7(7.62,0) 8(7.62,2.54) 9(10.16,0) 10(10.16,2.54) 11(12.7,0) 12(12.7,2.54) 13(15.24,0) 14(15.24,2.54)
  silkscreen extent -1.27,-1.27 16.51,3.81
HDR2X9 [mm]
  rect 1.5x1.5 hole 0.9: 1(0,0)
  round 1.5 hole 0.9: 2(0,2.54) 3(2.54,0) 4(2.54,2.54) 5(5.08,0) 6(5.08,2.54) 7(7.62,0) 8(7.62,2.54) 9(10.16,0) 10(10.16,2.54) 11(12.7,0) 12(12.7,2.54) 13(15.24,0) 14(15.24,2.54) 15(17.78,0) 16(17.78,2.54) 17(20.32,0) 18(20.32,2.54)
  silkscreen extent -1.27,-1.27 21.59,3.81
HDR2X10 [mm]
  rect 1.5x1.5 hole 0.9: 1(0,0)
  round 1.5 hole 0.9: 2(0,2.54) 3(2.54,0) 4(2.54,2.54) 5(5.08,0) 6(5.08,2.54) 7(7.62,0) 8(7.62,2.54) 9(10.16,0) 10(10.16,2.54) 11(12.7,0) 12(12.7,2.54) 13(15.24,0) 14(15.24,2.54) 15(17.78,0) 16(17.78,2.54) 17(20.32,0) 18(20.32,2.54) 19(22.86,0) 20(22.86,2.54)
  silkscreen extent -1.27,-1.27 24.13,3.81
HDR2X13_CEN_LP [mm] "Header, Shrouded, Dual Row, Low Profile Vertical, 26 pins, Centronics Printer Port pad numbering"
  rect 1.5x1.5 hole 0.9: 1(0,0)
  round 1.5 hole 0.9: 2(2.54,0) 3(5.08,0) 4(7.62,0) 5(10.16,0) 6(12.7,0) 7(15.24,0) 8(17.78,0) 9(20.32,0) 10(22.86,0) 11(25.4,0) 12(27.94,0) 13(30.48,0) 14(0,2.54) 15(2.54,2.54) 16(5.08,2.54) 17(7.62,2.54) 18(10.16,2.54) 19(12.7,2.54) 20(15.24,2.54) 21(17.78,2.54) 22(20.32,2.54) 23(22.86,2.54) 24(25.4,2.54) 25(27.94,2.54) 26(30.48,2.54)
  silkscreen extent -5.08,-3.18 35.56,5.72
KLD-0202 [mm] "PCB Mount DC Power Jack with 2.1mm or 2.5mm center pin"
  oval 2x4.5 all layers, no hole: 1(13.7,0)
  round 1.5 hole 1: 1A(13.7,-1.25) 1B(13.7,1.25) 2A(7.5,-1) 2B(7.5,1) 3A(9.5,-5) 3B(11.5,-5)
  oval 2x4 all layers, no hole: 2(7.5,0)
  oval 4x2 all layers, no hole: 3(10.5,-5)
  silkscreen extent 0,-4.5 14.6,4.5
MCCT-B [mm]
  rect 2x2.2 smd: 1(-1.5,0) 2(1.5,0)
  silkscreen extent -2.3,-1.6 1.8,1.6
MNR34 [mm] "3216x4 Resistor Array"
  rect 1.2x1 smd: 1(-1.575,1.905) 2(-1.575,0.635) 3(-1.575,-0.635) 4(-1.575,-1.905) 5(1.575,-1.905) 6(1.575,-0.635) 7(1.575,0.635) 8(1.575,1.905)
  silkscreen extent -1.67,-2.62 1.55,3.07
NanoBoard1_LOGO [mil] "NanoBoard 1 Logo"
  silkscreen extent -1007,-97 1007,96
POT4MM-2 [mm]
  rect 2x1.3 smd: CCW(-2,-1.15) CW(-2,1.15)
  rect 2x2 smd: W(2,0)
  silkscreen extent -2.5,-2.5 2.5,2.5
PS2-6PIN [mm] "PS2 Connector"
  round 1.6 hole 0.9: 1(-1.25,-8.5) 2(1.25,-8.5) 3(-3.25,-8.5) 4(3.25,-8.5) 5(-3.25,-11) 6(3.25,-11)
  round 3.5 hole 2.3: S(0,-4.75)
  silkscreen extent -7,-12.75 7,0
QC49/SMD [mm]
  rect 5x2 smd: 1(-4.75,0) 2(4.75,0)
  silkscreen extent -6.75,-2.4 5.7,2.4
QSMO_4200 [mm]
  rect 2x2 smd: 1(0,0.4) 2(5.08,0.4) 3(5.08,4.6) 4(0,4.6)
  silkscreen extent -1.19,-1.31 6.22,4.95
RB8/3.5 [mil]
  rect 70x70 hole 27.56: 1(0,60)
  round 70 hole 27.56: 2(0,-60)
  silkscreen extent -160,-160 160,160
"SMD _LED" [mm]
  rect 1.3x1.6 smd: 1(0.95,0) 2(-0.95,0)
  silkscreen extent -2.13,-1.15 2,1.15
SO8_MW/SO8_MN [mm] "S08 Wide / S08 Narrow dual footprint 8 lead Plastic Small Outline"
  rect 0.6x3.2 smd: 1(-1.905,-3.1) 2(-0.635,-3.1) 3(0.635,-3.1) 4(1.905,-3.1) 5(1.905,3.1) 6(0.635,3.1) 7(-0.635,3.1) 8(-1.905,3.1)
  silkscreen extent -2.88,-2.72 2.5,1.1
SO-G3 [mm]
  rect 0.85x1.3 smd: 1(-0.95,-1.1) 2(0.95,-1.1) 3(0,1.1)
  silkscreen extent -1.95,-1.32 1.95,0.3
SO-G5/P.95 [mm]
  rect 0.55x1.45 smd: 1(-0.95,-1.075) 2(0,-1.075) 3(0.95,-1.075) 4(0.95,1.075) 5(-0.95,1.075)
  silkscreen extent -2.42,-2.2 1.65,2.2
SO-G8 [mm]
  rect 0.6x2.2 smd: 1(-1.905,-2.6) 2(-0.635,-2.6) 3(0.635,-2.6) 4(1.905,-2.6) 5(1.905,2.6) 6(0.635,2.6) 7(-0.635,2.6) 8(-1.905,2.6)
  silkscreen extent -2.88,-2.72 2.5,1.1
SO-G14/Y2.2 [mm]
  rect 0.6x2.2 smd: 1(-3.81,-2.625) 2(-2.54,-2.625) 3(-1.27,-2.625) 4(0,-2.625) 5(1.27,-2.625) 6(2.54,-2.625) 7(3.81,-2.625) 8(3.81,2.625) 9(2.54,2.625) 10(1.27,2.625) 11(0,2.625) 12(-1.27,2.625) 13(-2.54,2.625) 14(-3.81,2.625)
  silkscreen extent -4.79,-2.75 4.38,1.12
SO-G16 [mm]
  rect 0.6x2.2 smd: 1(-4.445,-2.6) 2(-3.175,-2.6) 3(-1.905,-2.6) 4(-0.635,-2.6) 5(0.635,-2.6) 6(1.905,-2.6) 7(3.175,-2.6) 8(4.445,-2.6) 9(4.445,2.6) 10(3.175,2.6) 11(1.905,2.6) 12(0.635,2.6) 13(-0.635,2.6) 14(-1.905,2.6) 15(-3.175,2.6) 16(-4.445,2.6)
  silkscreen extent -5.42,-2.72 5,1.1
SO-J32 [mm]
  rect 0.6x2.2 smd: 1(-9.525,-3.6) 2(-8.255,-3.6) 3(-6.985,-3.6) 4(-5.715,-3.6) 5(-4.445,-3.6) 6(-3.175,-3.6) 7(-1.905,-3.6) 8(-0.635,-3.6) 9(0.635,-3.6) 10(1.905,-3.6) 11(3.175,-3.6) 12(4.445,-3.6) 13(5.715,-3.6) 14(6.985,-3.6) 15(8.255,-3.6) 16(9.525,-3.6) 17(9.525,3.6) 18(8.255,3.6) 19(6.985,3.6) 20(5.715,3.6) 21(4.445,3.6) 22(3.175,3.6) 23(1.905,3.6) 24(0.635,3.6) 25(-0.635,3.6) 26(-1.905,3.6) 27(-3.175,3.6) 28(-4.445,3.6) 29(-5.715,3.6) 30(-6.985,3.6) 31(-8.255,3.6) 32(-9.525,3.6)
  silkscreen extent -10.5,-4.19 10.33,4.19
SOIC8 [mm]
  rect 1.5x0.5 smd: 1(0,0) 2(0,-1.27) 3(0,-2.54) 4(0,-3.81) 5(6,-3.81) 6(6,-2.54) 7(6,-1.27) 8(6,0)
  silkscreen extent 1.1,-4.5 4.9,0.7
SOT23_8 [mm]
  rect 1.5x0.35 smd: 1(-1.5,0.975) 2(-1.5,0.325) 3(-1.5,-0.325) 4(-1.5,-0.975) 5(1.5,-0.975) 6(1.5,-0.325) 7(1.5,0.325) 8(1.5,0.975)
  silkscreen extent -0.55,-1.3 0.55,1.3
SSO-G20/P.65 [mm]
  rect 0.4x2.15 smd: 1(-2.925,-3.275) 2(-2.275,-3.275) 3(-1.625,-3.275) 4(-0.975,-3.275) 5(-0.325,-3.275) 6(0.325,-3.275) 7(0.975,-3.275) 8(1.625,-3.275) 9(2.275,-3.275) 10(2.925,-3.275) 11(2.925,3.275) 12(2.275,3.275) 13(1.625,3.275) 14(0.975,3.275) 15(0.325,3.275) 16(-0.325,3.275) 17(-0.975,3.275) 18(-1.625,3.275) 19(-2.275,3.275) 20(-2.925,3.275)
  silkscreen extent -3.8,-3.4 3.75,1.8
ST-3150-5N [mm] "3.5mm Stereo Jack, 5 pin, 8.1mm wide"
  oval 2.7x1.8 all layers, no hole: 1(-0.85,-5.2) 2(1.15,-7.65) 3(-0.85,-11.35) 4(1.15,-13.25) 5(-0.85,-17)
  round 1.2 hole 1: 1A(-1.3,-5.2) 1B(-0.4,-5.2) 2A(0.7,-7.65) 2B(1.6,-7.65) 3A(-1.3,-11.35) 3B(-0.4,-11.35) 4A(0.7,-13.25) 4B(1.6,-13.25) 5A(-1.3,-17) 5B(-0.4,-17)
  silkscreen extent -4.9,-18 3.2,0
TL36WW15050 [mm] "Vertical right angle SPDT switch"
  round 2 hole 1.1: 1(0,0) 2(0,-2.54) 3(0,-5.08) M(0,5.08)
  Top Layer keep-out region: -2.54,1.27 2.54,1.27 2.54,8.509 -2.54,8.509
  Top Layer keep-out region: -2.54,0 -1.27,0 -1.27,1.27 -2.54,1.27
  Top Layer keep-out region: 1.27,0 2.54,0 2.54,1.27 1.27,1.27
  silkscreen extent -2.54,0 2.54,19.56
TO-263 [mm] "D2-PACK SIP-G3/P2.54"
  rect 1x3.4 smd: 1(0,0) 2(2.54,0) 3(5.08,0)
  rect 10.25x8.9 smd: 4(2.54,10.45)
  silkscreen extent -3.1,-3.13 8.2,15
TQ144 [mm] "144-Pin Thin Quad Flat Pack (TQ144)"
  rect 1.6x0.3 smd: 1(-10.6,8.75) 2(-10.6,8.25) 3(-10.6,7.75) 4(-10.6,7.25) 5(-10.6,6.75) 6(-10.6,6.25) 7(-10.6,5.75) 8(-10.6,5.25) 9(-10.6,4.75) 10(-10.6,4.25) 11(-10.6,3.75) 12(-10.6,3.25) 13(-10.6,2.75) 14(-10.6,2.25) 15(-10.6,1.75) 16(-10.6,1.25) 17(-10.6,0.75) 18(-10.6,0.25) 19(-10.6,-0.25) 20(-10.6,-0.75) 21(-10.6,-1.25) 22(-10.6,-1.75) 23(-10.6,-2.25) 24(-10.6,-2.75) 25(-10.6,-3.25) 26(-10.6,-3.75) 27(-10.6,-4.25) 28(-10.6,-4.75) 29(-10.6,-5.25) 30(-10.6,-5.75) 31(-10.6,-6.25) 32(-10.6,-6.75) 33(-10.6,-7.25) 34(-10.6,-7.75) 35(-10.6,-8.25) 36(-10.6,-8.75) 73(10.6,-8.75) 74(10.6,-8.25) 75(10.6,-7.75) 76(10.6,-7.25) 77(10.6,-6.75) 78(10.6,-6.25) 79(10.6,-5.75) 80(10.6,-5.25) 81(10.6,-4.75) 82(10.6,-4.25) 83(10.6,-3.75) 84(10.6,-3.25) 85(10.6,-2.75) 86(10.6,-2.25) 87(10.6,-1.75) 88(10.6,-1.25) 89(10.6,-0.75) 90(10.6,-0.25) 91(10.6,0.25) 92(10.6,0.75) 93(10.6,1.25) 94(10.6,1.75) 95(10.6,2.25) 96(10.6,2.75) 97(10.6,3.25) 98(10.6,3.75) 99(10.6,4.25) 100(10.6,4.75) 101(10.6,5.25) 102(10.6,5.75) 103(10.6,6.25) 104(10.6,6.75) 105(10.6,7.25) 106(10.6,7.75) 107(10.6,8.25) 108(10.6,8.75)
  rect 0.3x1.6 smd: 37(-8.75,-10.6) 38(-8.25,-10.6) 39(-7.75,-10.6) 40(-7.25,-10.6) 41(-6.75,-10.6) 42(-6.25,-10.6) 43(-5.75,-10.6) 44(-5.25,-10.6) 45(-4.75,-10.6) 46(-4.25,-10.6) 47(-3.75,-10.6) 48(-3.25,-10.6) 49(-2.75,-10.6) 50(-2.25,-10.6) 51(-1.75,-10.6) 52(-1.25,-10.6) 53(-0.75,-10.6) 54(-0.25,-10.6) 55(0.25,-10.6) 56(0.75,-10.6) 57(1.25,-10.6) 58(1.75,-10.6) 59(2.25,-10.6) 60(2.75,-10.6) 61(3.25,-10.6) 62(3.75,-10.6) 63(4.25,-10.6) 64(4.75,-10.6) 65(5.25,-10.6) 66(5.75,-10.6) 67(6.25,-10.6) 68(6.75,-10.6) 69(7.25,-10.6) 70(7.75,-10.6) 71(8.25,-10.6) 72(8.75,-10.6) 109(8.75,10.6) 110(8.25,10.6) 111(7.75,10.6) 112(7.25,10.6) 113(6.75,10.6) 114(6.25,10.6) 115(5.75,10.6) 116(5.25,10.6) 117(4.75,10.6) 118(4.25,10.6) 119(3.75,10.6) 120(3.25,10.6) 121(2.75,10.6) 122(2.25,10.6) 123(1.75,10.6) 124(1.25,10.6) 125(0.75,10.6) 126(0.25,10.6) 127(-0.25,10.6) 128(-0.75,10.6) 129(-1.25,10.6) 130(-1.75,10.6) 131(-2.25,10.6) 132(-2.75,10.6) 133(-3.25,10.6) 134(-3.75,10.6) 135(-4.25,10.6) 136(-4.75,10.6) 137(-5.25,10.6) 138(-5.75,10.6) 139(-6.25,10.6) 140(-6.75,10.6) 141(-7.25,10.6) 142(-7.75,10.6) 143(-8.25,10.6) 144(-8.75,10.6)
  round 1 smd paste-0.55 mask+1: FID1(-10.6,-10.6) FID2(10.6,10.6)
  Top Layer keep-out circle w0.2: c10.6,10.6 r1.072
  Top Layer keep-out circle w0.2: c-10.6,-10.6 r1.072
  silkscreen extent -10.72,-9.4 9.4,9.57
TS2.54x10 [mm] "10 way 2.54mm Pitch screw terminal"
  round 1.85 hole 1.1: 1(0,0) 2(0,-2.54) 3(0,-5.08) 4(0,-7.62) 5(0,-10.16) 6(0,-12.7) 7(0,-15.24) 8(0,-17.78) 9(0,-20.32) 10(0,-22.86)
  silkscreen extent -3.35,-24.36 3.25,2.65
TSSO3x5-G8/X.35 [mm]
  rect 0.35x1.5 smd: 1(-0.975,-2.075) 2(-0.325,-2.075) 3(0.325,-2.075) 4(0.975,-2.075) 5(0.975,2.075) 6(0.325,2.075) 7(-0.325,2.075) 8(-0.975,2.075)
  silkscreen extent -1.82,-2.2 1.52,0.92
USOP10 [mm]
  rect 1.5x0.25 smd: 1(-2.5,1) 2(-2.5,0.5) 3(-2.5,0) 4(-2.5,-0.5) 5(-2.5,-1) 6(2.5,-1) 7(2.5,-0.5) 8(2.5,0) 9(2.5,0.5) 10(2.5,1)
  silkscreen extent -1.5,-1.4 1.5,1.4
VO20 [mm] "20-Lead TSOP (VO20)"
  rect 0.3x1.65 smd: 1(-2.925,-2.775) 2(-2.275,-2.775) 3(-1.625,-2.775) 4(-0.975,-2.775) 5(-0.325,-2.775) 6(0.325,-2.775) 7(0.975,-2.775) 8(1.625,-2.775) 9(2.275,-2.775) 10(2.925,-2.775) 11(2.925,2.775) 12(2.275,2.775) 13(1.625,2.775) 14(0.975,2.775) 15(0.325,2.775) 16(-0.325,2.775) 17(-0.975,2.775) 18(-1.625,2.775) 19(-2.275,2.775) 20(-2.925,2.775)
  silkscreen extent -3.75,-2.9 3.3,1.55

## Part data
C1 C5 C9 C15 C16 C21 C22 C23 C24 C25 C26 C27 C30 C35 C38 C39 C46 C48: library part CAP_POLAR, "Polar Capacitor"
C2 C3 C4 C6 C7 C8 C10 C11 C12 C13 C14 C17 C18 C19 C20 C28 C29 C31 C32 C33 C34 C36 C37 C40 C41 C42 C43 C44 C45 C47 C49 C50 C51 C52 C53 C54 C55 C56 C57 C58 C59 C60 C61 C62 C63 C64 C65 C66 C67 C68 C69 C70 C71 C72 C73 C74 C75 C76 C77 C78 C79 C80 C81 C82 C83 C84 C85 C86 C87 C88: library part CAP, "Capacitor"
CR1: "SMD Crystal 20MHz HY-Q"
D1 D2 D3 D4 D5: "Shottky Diode Pair"
D6: "Shottky Diode"
D7: library part BZG03C13, "Zener Diode, 6.2V, 5W"
GJ1 GJ2 GJ3 GJ4 GJ5 GJ6 GJ7 GJ8 JP3: "Header, 2-Pin"
HDR1 HDR2 HDR4 HDR5: "Header, 5-Pin, Dual row"
HDR3: library part "Header 13X2A", "Header, 13-Pin, Dual row"
HDR6 HDR7: library part "Header 5X2", "Header, 5-Pin, Dual row"
HDR8: "Header, 7-Pin, Dual row"
HDR9 HDR10: "Header, 10-Pin, Dual row"
J1: library part "D Connector 9", "Receptacle Assembly, 9 Position, Right Angle"
J2: "Receptacle Assembly, 9 Position, Right Angle"
J3: "Dsub-15 High density VGA Female connetor"
J4 J5: library part PS2-6PIN, "6 Pin Through Hole PS2 Socket (Kycon P/N)"
J6 J7: "Low Voltage Power Supply Connector"
J8 J9: "Board-to-Board, Docking Station, 0.80mm (.031\") Pitch, Shielded Plug, Vertical, Ultra Low Profile, SMT"
J10 J11: "3-Conductor Jack with 2 break contacts (normals) and 2 auxiliary make contacts"
JP1 JP4 JP5 JP6: "Header, 2-Pin, Dual row"
JP2: "Header, 9-Pin, Dual row"
L1: library part INDUCTOR, "Inductor e.g. Farnell 3876895"
LCD1: "16 char * 2 line LCD character display with b/light"
LED0 LED1 LED2 LED3 LED4 LED5 LED6 LED7 LED8 LED9 LED10 LED11 LED12 LED13 LED14 LED15 LED16: library part HSMX-C670, "Typical RED GaAs SMD LED Agilent make"
Q1 Q3 Q4: "N Channel Mosfet"
Q2: "P Channel Mosfet"
R1 R2 R3 R4 R5 R6 R7 R8 R9 R10 R11 R12 R13 R14 R15 R16 R17 R18 R19 R20 R21 R22 R23 R24 R25 R26 R27 R28 R29 R30 R31 R32 R33 R34 R35 R36 R37 R38 R39 R40 R41 R42 R43 R44 R45 R46 R47 R48 R49 R50 R51 R52 R53 R54 R55 R56 R57 R58 R59 R60 R61 R62 R63 R64 R65 R66 R67 R68 R69 R70 R71 R72 R73 R74 R75 R76 R77 R78 R79 R80: library part RES, "Resistor"
RA1 RA2 RA3 RA4 RA5 RA6 RA7 RA8 RA9 RA10 RA11 RA12 RA13 RA14 RA15 RA16 RA17 RA18 RA19 RA20 RA21 RA22 RA23 RA24 RA25 RA26 RA27 RA28 RA29 RA30 RA31 RA32: library part MNR34, "3216x4 Resistor Array"
S1: library part PCB_MOUNT_SWITCH, "SPDT Subminiature Toggle Switch"
S2: "DIP Switch Side actuator long liver Piano Key"
SPKR1: "Megastar Subminiature Transducer"
SW1 SW2 SW3 SW4 SW5 SW6 SW7 SW8 SW9 SW10 SW11 SW12 SW13 SW14 SW15 SW16 SW17: library part B3FS, "SPNA SMD Keyboard Switch"
TS1: "Screw Terminal Strip, 10 Way, 2.54 mm Pitch"
U1: library part MAX3232EUE, "3.0V TO 5.5V, Low-Power, up to 1Mbps, True RS-232 Transceiver Using Four 0.1µF External Capacitor"
U2: "High Speed Can Transceiver"
U3: library part MC74HC00AD, "Quad 2-Input NAND Gate"
U4: library part 74LVC244A, "Octal Buffer/Driver with 3-State Outputs"
U5: "XCF00S Series, Platform Flash In-System Programmable Configuration 3.3V PROM, 1-Megabit, Commercial Grade"
U6: library part M25P10-VMN6, "8 Mbit Flash Serial Prom"
U7: library part M25P20-VMN6, "8 Mbit Flash Serial Prom"
U8: "Spartan-IIE 1.8V FPGA, 144-Pin TQFP, Standard Performance, Commercial Grade"
U9 U10 U11: "5A Low Dropout Possitive Regulators"
U12: library part ICS307-02, "Serial Programmable PLL Oscillator"
U13: "Surface Mount Crystal Oscillator"
U14 U15: "128K x 8 bit Fast Static RAM"
U16: library part SN74AHC1G04DBVR
U17: library part 74LVC245A, "Octal Bus Transceiver with 3-State Outputs"
U19: "8 bit CODEC with 4 wire logic interface"
U20: library part MAX5841, "4 Channel DAC,I2C,2.7V to 5.5V"
U21: library part MAX1037, "4 Channel 8 Bit ADC, I2C interface, 2.7V to 3.6V Supply"
VR1 VR2: library part POT_M, "Potentiometer"

## Free pads (board coordinates)
  round 31.5 / inner round 31.5 / far side round 78.74 hole 39.37 unplated mask+3.94: KP1(725,2900) KP2(2575,2900) KP3(725,1050) KP4(2575,1050)
  round 98.43 hole 196.85 unplated mask+3.94: LP(4248.9,1972.83) LP(6650.47,791.73) LP(6650.47,3508.27)
  round 118.11 hole 129.92 unplated mask+3.94: M1(200,6300) M2(7700,6300) M3(200,200) M4(7700,200) M5(3420,3050) M6(6550,5430) M7(6550,2200)
  round 59.06 hole 31.5: TP(6175,3630) TP(6275,3630)

## Via types
v1: diameter 35.43, hole 19.68, Top Layer to Bottom Layer, 194 vias
v2: diameter 35.43, hole 19.68, Top Layer to Bottom Layer, tented both sides, 169 vias
v3: diameter 50, hole 27.56, Top Layer to Bottom Layer, 5 vias